# EAGLE board Receptor Solo (EAGLE 9.6.2)
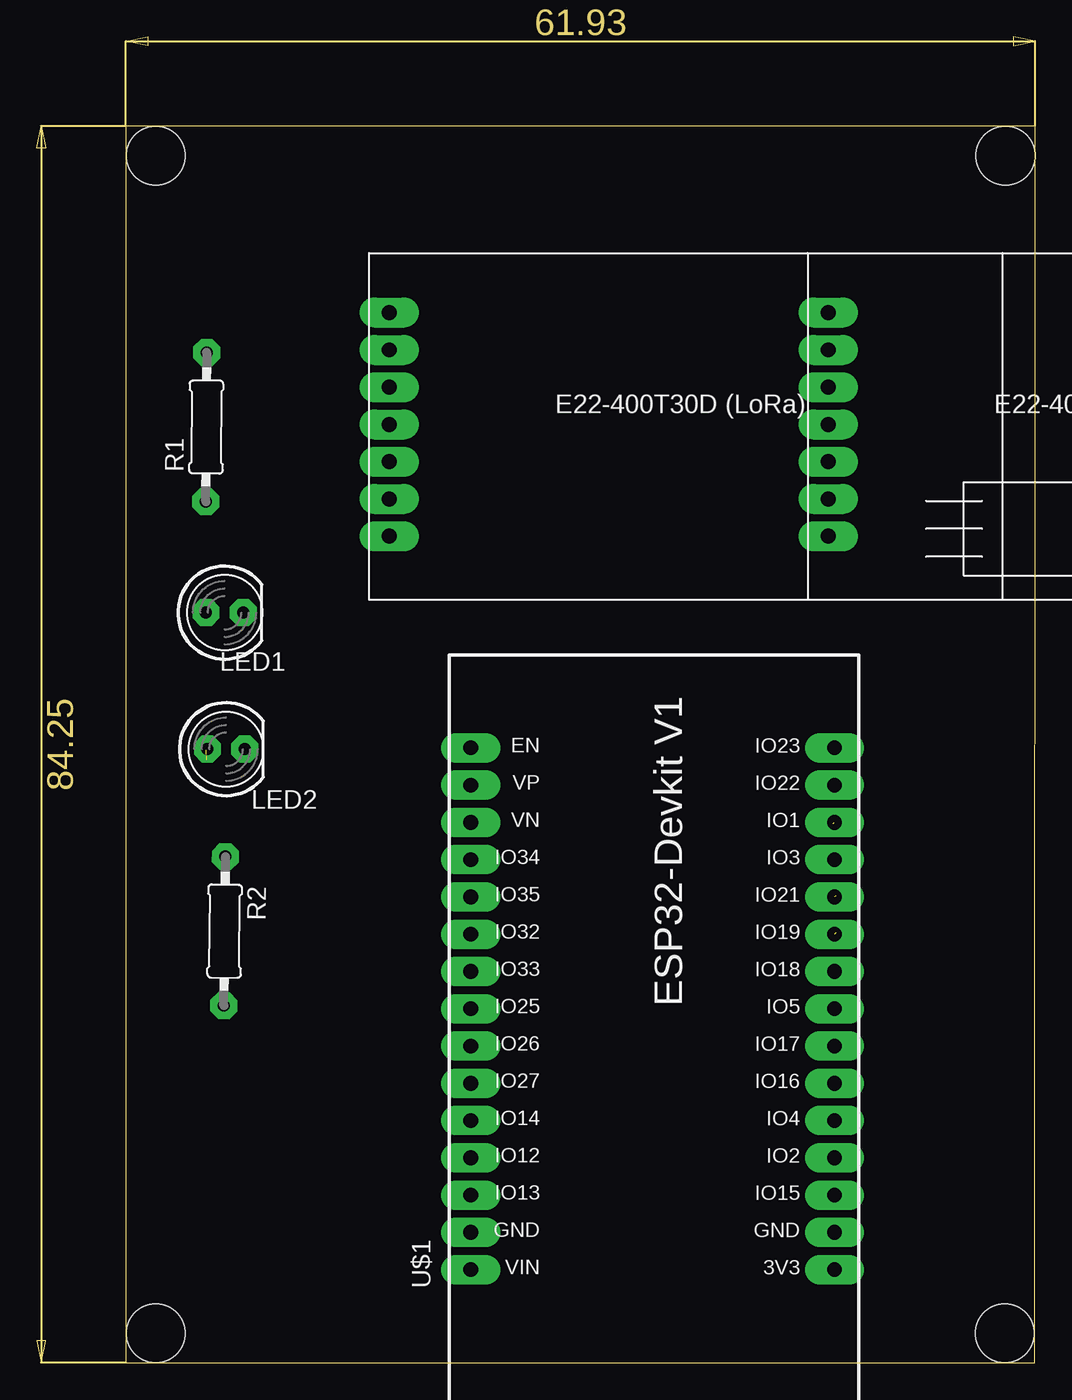
[diagram p0: board, top side]
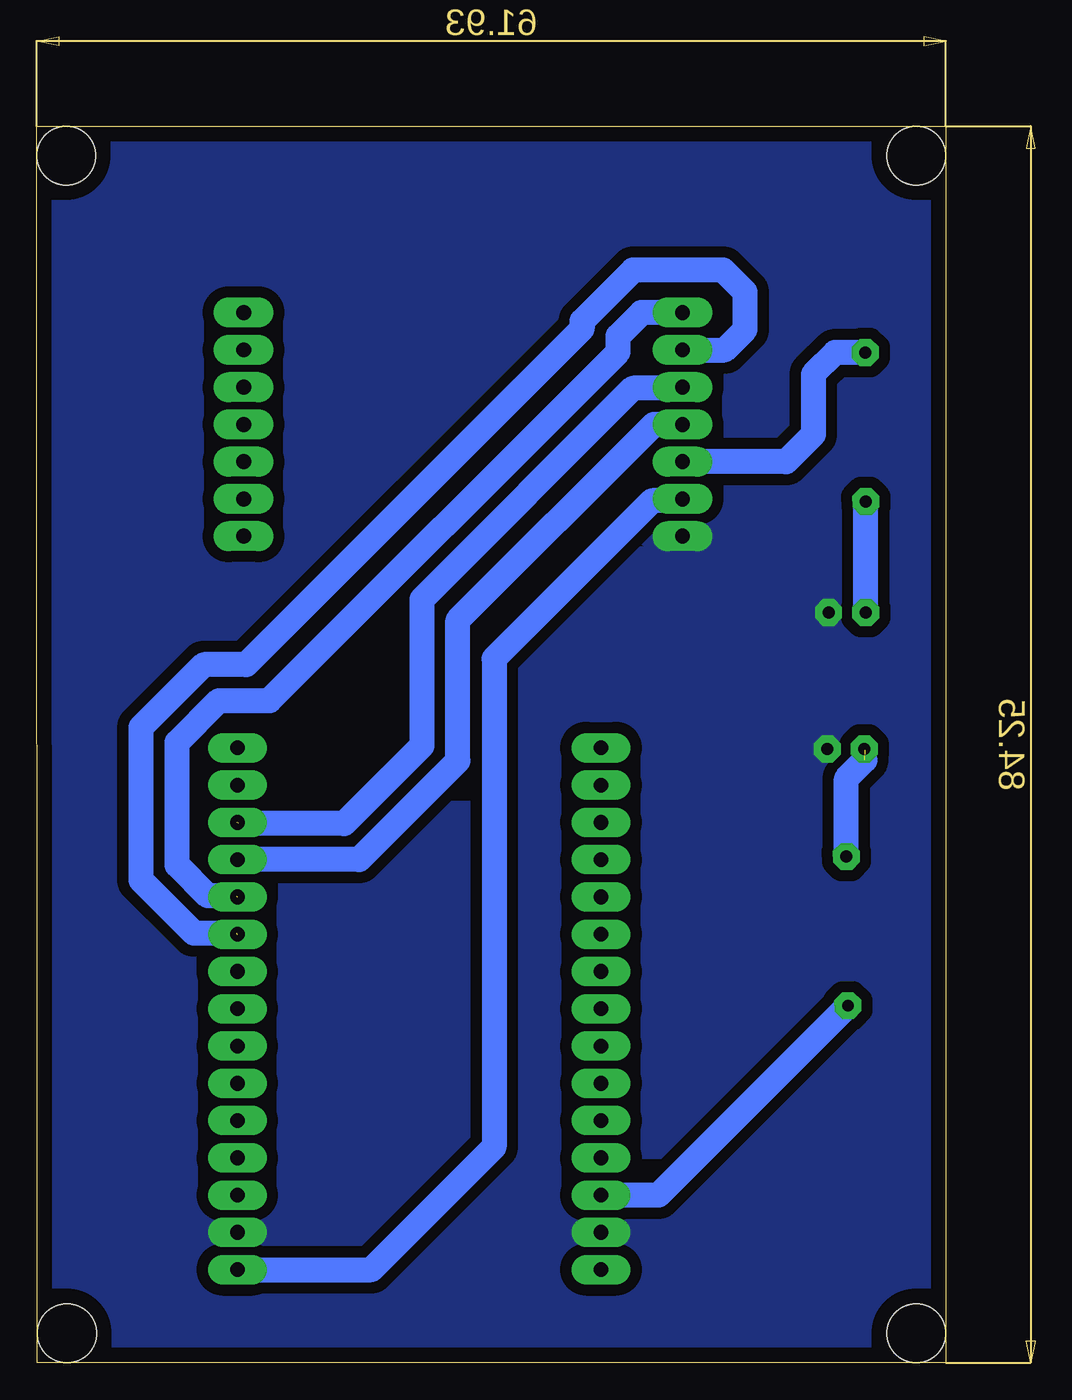
[diagram p1: board, bottom side, seen from below]

Size 61.93 x 84.27 mm. Coordinates in mm from the lower left corner, seen from the top.
Outline: 0,0.02 61.91,0 61.93,84.27 0,84.27 0,0.02
Copper layers (1*16): Top 0.035mm / dielectric 1.5mm / Bottom 0.035mm
Design rules "CACTUS_DEFAULT": minimum track width 1.7mm, minimum drill 1mm, track to track 30mil, track to pad 20mil, pad to pad 6mil, via to via 6mil, smd to smd 6mil, copper to edge 40mil, drill to drill 6mil, minimum pad ring 22mil, minimum via ring 22mil, stop-mask expansion 4mil, vias tented up to drill 0mil, thermal gap 0mil
Holes 4 mm at 2.02,82.27 2.02,2.02 59.92,82.27 59.87,2.02

## Footprints (pad centres in the part's own frame; a part is rotated, then mirrored left to right if it is on the bottom)
E22-400T30D_FOOTPRINT = drill 1.016 long: AUX -16.383,-0.762; GND -16.383,-5.842; M0 -16.383,9.398; M1 -16.383,6.858; RXD -16.383,4.318; TXD -16.383,1.778; VCC -16.383,-3.302
LED5MM = drill 0.813 octagon: A -1.27,0; K 1.27,0
0207/10 = drill 0.813 octagon: 1 -5.08,0; 2 5.08,0
ESP32-DEVKITV1 = drill 1 pad 1.016 long: 1 -22.87,-13.54; 2 -20.33,-13.54; 3 -17.79,-13.54; 4 -15.25,-13.54; 5 -12.71,-13.54; 6 -10.17,-13.54; 7 -7.63,-13.54; 8 -5.09,-13.54; 9 -2.55,-13.54; 10 -0.01,-13.54; 11 2.53,-13.54; 12 5.07,-13.54; 13 7.61,-13.54; 14 10.15,-13.54; 15 12.69,-13.54; 16 12.69,11.23; 17 10.15,11.23; 18 7.61,11.23; 19 5.07,11.23; 20 2.53,11.23; 21 -0.01,11.23; 22 -2.55,11.23; 23 -5.09,11.23; 24 -7.63,11.23; 25 -10.17,11.23; 26 -12.71,11.23; 27 -15.25,11.23; 28 -17.79,11.23; 29 -20.33,11.23; 30 -22.87,11.23

## Placement (x,y rotation side)
FUROSDEAPOIOLORA  E22-400T30D  [E22-400T30D_FOOTPRINT]  64.22,62.17 0 top
LED1  [LED5MM]  6.72,51.12 0 top
LED2  [LED5MM]  6.82,41.82 0 top
R1  330  [0207/10]  5.47,63.77 89.7 top
R2  330  [0207/10]  6.72,29.42 269.4 top
U$1  ESP32DEVKITV1  [ESP32-DEVKITV1]  34.72,29.22 90 top
U$2  E22-400T30D  [E22-400T30D_FOOTPRINT]  34.32,62.17 0 top

## Library data of the parts
FUROSDEAPOIOLORA U$2 = CRD
LED1 LED2 = led
R1 R2 = rcl; SPICEPREFIX: R
U$1 = ESP32-DEVKITV1

## Nets
3.3V: U$1.1 U$2.VCC
AUX: R1.2 U$2.AUX
GND: LED1.K LED2.K U$1.2 U$1.29 U$2.GND
GPIO13: R2.2 U$1.28
GPIO19: U$1.10 U$2.M1
GPIO21: U$1.11 U$2.M0
N$7: LED1.A R1.1
N$9: LED2.A R2.1
RXLORA: U$1.13 U$2.RXD
TXLORA: U$1.12 U$2.TXD

## Tracks (layer width: path | path; a pad name or v marks a point on that pad's centre or on a via)
3.3V
  Bottom 1.7: U$2.VCC 18.05,58.75 20.01,58.75 30.77,47.99 30.77,14.72 39.14,6.35 U$1.1
AUX
  Bottom 1.7: R1.2 7.54,68.85 9.02,67.37 9.02,63.27 10.88,61.4 U$2.AUX
GND
  pour Bottom: 1.22,82.92 60.92,82.92 60.92,78.12 60.92,1.02 57.72,1.02 1.22,1.02
GPIO13
  Bottom 1.7: R2.2 19.58,11.43 U$1.28
GPIO19  (1 unrouted)
  Bottom 1.7: 48.34,29.29 51.22,29.29 54.83,32.9 54.83,43.29 50.55,47.58 47.67,47.58 24.78,70.47 24.78,70.99 21.3,74.47 15.17,74.47 13.67,72.97 13.67,70.42 15.06,69.03 U$2.M1
GPIO21  (1 unrouted)
  Bottom 1.7: 48.34,31.82 50.27,31.82 52.37,33.92 52.37,42.27 49.53,45.12 46.08,45.12 22.32,68.88 22.32,69.97 20.72,71.56 U$2.M0
N$7
  Bottom 1.7: LED1.A R1.1
N$9  (1 unrouted)
  Bottom 1.7: LED2.A 5.48,41.75 | R2.1 6.77,39.81 5.52,41.07
RXLORA  (1 unrouted)
  Bottom 1.7: U$2.RXD 18.01,66.41 21.31,66.41 35.69,52.02 35.69,42.04 40.98,36.75 48.18,36.75
TXLORA
  Bottom 1.7: U$1.12 39.96,34.29 33.23,41.02 33.23,50.6 19.89,63.95 U$2.TXD